# Altium PCB photon_v1.0.0.pcbdoc
Units mil, origin at the board's own origin, x right, y up, seen from the top; angles counter-clockwise.
Board outline not stored, 2 copper layers (Top, Bottom), stack 0 mil thick; 54 components, 59 nets, 229 pads, 110 vias.
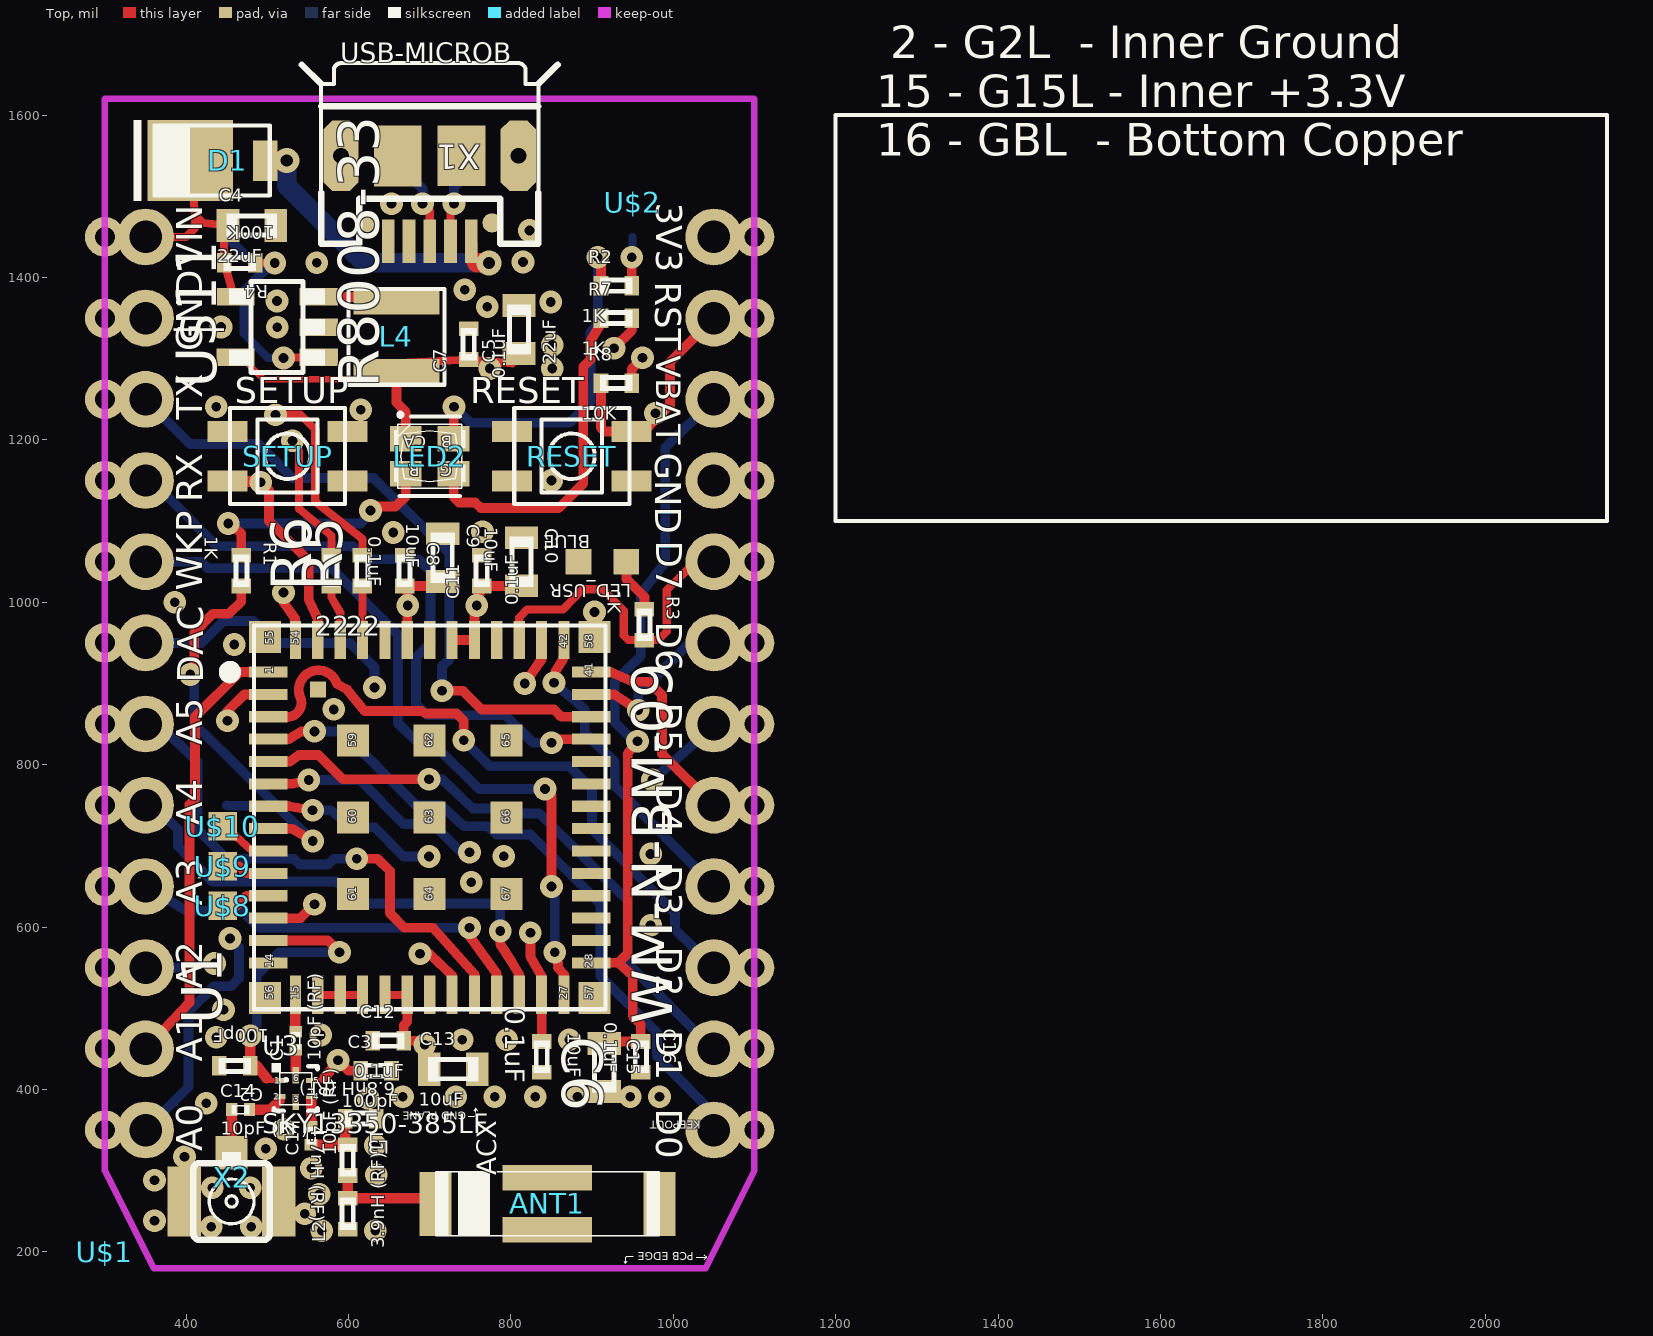
[diagram p0: Top view]
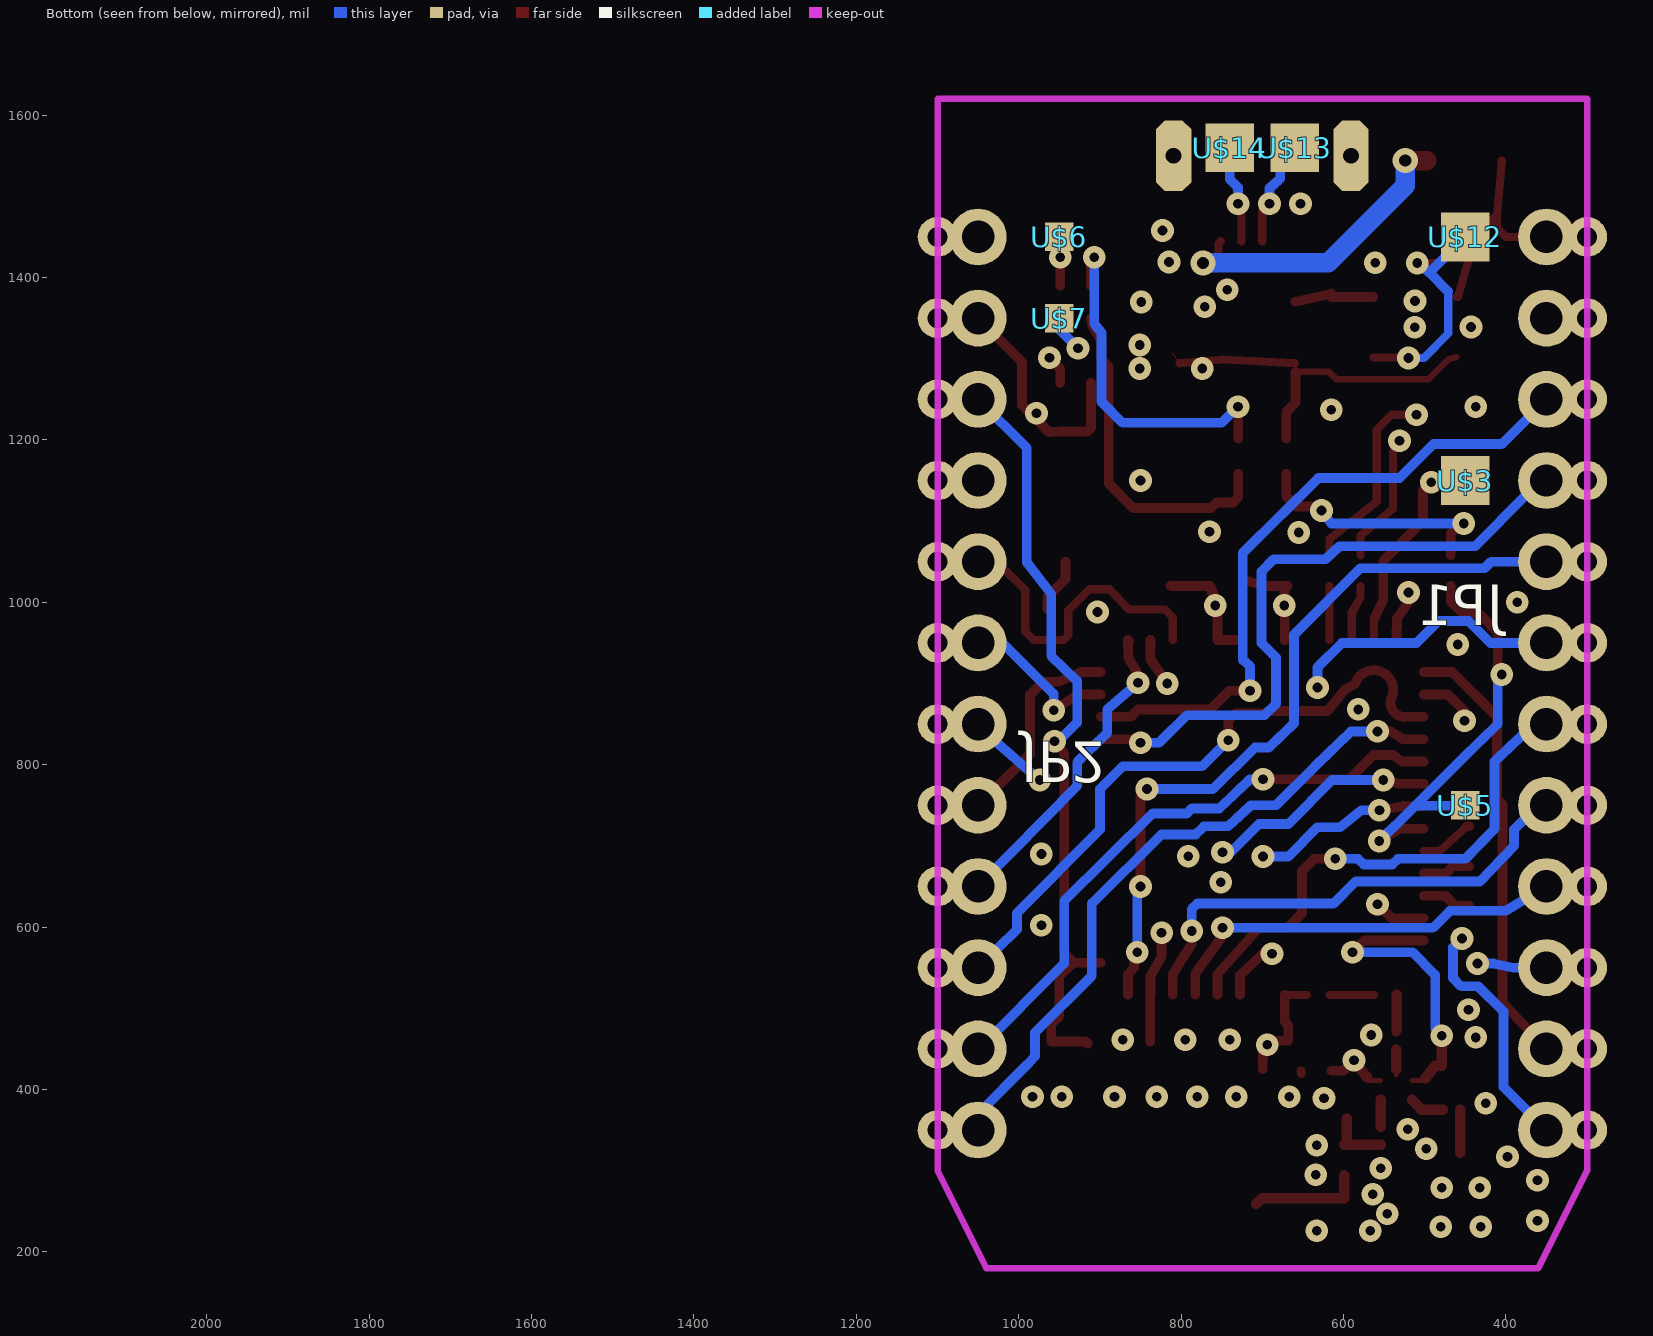
[diagram p1: Bottom view, seen from below]

## Layer stack, top to bottom

## Components (designator, comment, footprint, x,y, rotation, side; value= is the part's Value field where it differs from the comment)
ANT1 "" AT7020 845,259 r180 top
C1 "10pF (RF)" C0201_B 535,460 r90 top
C2 "100pF" C0402_B 460,429 r180 top
C3 "100pF" C0402_B 634,423 r0 top
C4 "22uF" C0603_B 481,1464 r0 top
C5 "22uF" C0603_B 810,1336 r90 top
C6 "0.1uF" C0402_B 838,440 r270 top
C7 "0.1uF" C0402_B 748,1318 r90 top
C8 "0.1uF" C0402_B 669,1039 r270 top
C9 "10uF" C0603_B 716,1055 r270 top
C10 "10uF" C0603_B 813,1050 r270 top
C11 "0.1uF" C0402_B 764,1039 r90 top
C12 "0.1uF" C0402_B 649,460 r0 top
C13 "10uF" C0603_B 729,425 r0 top
C14 "10pF (RF)" C0201_B 467,375 r0 top
C15 "10uF" C0603_B 915,427 r270 top
C16 "0.1uF" C0402_B 960,440 r270 top
C17 "10pF (RF)" C0201_B 554,343 r90 top
D1 "" DIODE-DO-220AA(SMP) 405,1544 r0 top
JP1 "" 1X12-CASTELLATED 350,900 r0 bottom
JP2 "" 1X12-CASTELLATED 1050,900 r180 bottom
L1 "4.7nH (RF)" L0402_B 599,313 r270 top
L2 "3.9nH (RF)" L0402_B 599,247 r90 top
L3 "6.8nH (RF)" L0402_B 615,364 r180 top
L4 "" INDUCTOR-NR3015 659,1327 r270 top
LED2 "" PLCC4-2MM-RGB 700,1180 r180 top
LED_USR "BLUE" LED-0603-NO-SS 913,1050 r90 top
R1 "1K" R0402_B 468,1039 r270 top
R2 "1K" R0402_B 930,1390 r0 top
R3 "1K" R0402_B 964.48,972.47 r270 top
R4 "100K" R0402_B 466,1418 r180 top
R5 "22" R0402_B 617,1039 r90 top
R6 "22" R0402_B 579,1039 r90 top
R7 "1K" R0402_B 930,1350 r0 top
R8 "10K" R0402_B 930,1270 r0 top
RESET "" TACTILE_SWITCH_SMD 875,1180 r0 top
SETUP "" TACTILE_SWITCH_SMD 525,1180 r0 top
U1 "WM-N-BM-09" WM-N-BM-09 700,735 r90 top
U3 "SKY13350-385LF" XFDFN-6 535,401 r0 top
U$1 "" PHOTON-TOP-SS-2 300,200 r0 top
U$2 "" SPARK_LOGO2 950,1493 r0 top
U$3 "" TP60_BOT 450,1150 r0 top
U$5 "" TP35_BOT 450,750 r0 top
U$6 "" TP35_BOT 950,1450 r0 top
U$7 "" TP35_BOT 950,1350 r0 top
U$8 "" TP35_BOT 445,626 r0 bottom
U$9 "" TP35_BOT 445,675 r0 bottom
U$10 "" TP35_BOT 445,724 r0 bottom
U$11 "R8008-33" SOT23-5 512,1339 r90 top
U$12 "" TP60_BOT 450,1450 r0 top
U$13 "" TP60_BOT 660,1560 r0 top
U$14 "" TP60_BOT 740,1560 r0 top
X1 "USB-MICROB" USB-MICROB-SLOT-HOLE 700,1550 r180 top
X2 "" IPEX-20279-001E 456,262 r0 top

## Footprints (in the part's own frame and the unit in brackets; to place one, negate y for a bottom-side part, rotate by r counter-clockwise, add the part's x,y. Pads: shape width x height; smd on the part's side, far side on the other; paste and mask are expansions set on the pad)
1X12-CASTELLATED [mil]
  round 70 hole 40: 1(0,550) 2(0,450) 3(0,350) 4(0,250) 5(0,150) 6(0,50) 7(0,-50) 8(0,-150) 9(0,-250) 10(0,-350) 11(0,-450) 12(0,-550)
  round 49 hole 25: @1(-50,550) @2(-50,450) @3(-50,350) @4(-50,250) @5(-50,150) @6(-50,50) @7(-50,-50) @8(-50,-150) @9(-50,-250) @10(-50,-350) @11(-50,-450) @12(-50,-550)
AT7020 [mm]
  rect 1x2 smd: 1(3.5,0) 3(-3.5,0)
  rect 2.8x0.8 smd: 2(0,0.815) 4(0,-0.815)
  silkscreen extent -4.99,-2.99 4.99,1.86
C0201_B [mil]
  rect 14x16 smd: 1(-11,0) 2(11,0)
  silkscreen extent -11,-6 11,6
C0402_B [mil]
  rect 18x24 smd: 1(-19,0) 2(19,0)
  silkscreen extent -20,-10 20,10
C0603_B [mil]
  rect 28x41 smd: 1(-29.5,0) 2(29.5,0)
  silkscreen extent -31,-15 31,15
DIODE-DO-220AA(SMP) [mil]
  rect 30x50 smd: ANODE(92.5,0)
  rect 105x100 smd: CATHODE(0,0)
  silkscreen extent -70,-50 98,50
INDUCTOR-NR3015 [mm]
  rect 0.8x2.7 smd: 1(-1.1,0) 2(1.1,0)
  silkscreen extent -1.5,-1.5 1.5,1.5
IPEX-20279-001E [mm]
  rect 1x1.05 smd: 1(0,1.528)
  rect 1.05x2.2 smd: 2@1(-1.475,0) 2@2(1.475,0)
  silkscreen extent -1.2,-1.2 1.2,1.55
L0402_B [mil]
  rect 18x24 smd: 1(-19,0) 2(19,0)
  silkscreen extent -20,-10 20,10
LED-0603-NO-SS [mm]
  rect 0.8x0.8 smd: A1(0,-0.745) C1(0,0.755)
PHOTON-TOP-SS-2 [mil]
PLCC4-2MM-RGB [mm]
  rect 1x0.8 smd: BLUE(-0.75,-0.55) CA(0.75,-0.55) GREEN(-0.75,0.55) RED(0.75,0.55)
  silkscreen extent -1.12,-1.32 1.12,1.24
R0402_B [mil]
  rect 18x24 smd: 1(-19,0) 2(19,0)
  silkscreen extent -20,-10 20,10
SOT23-5 [mm]
  rect 0.55x1.2 smd: 1(-0.95,-1.3) 2(0,-1.3) 3(0.95,-1.3) 4(0.95,1.3) 5(-0.95,1.3)
  silkscreen extent -1.42,-1.5 1.42,1.5
SPARK_LOGO2 [mil]
TACTILE_SWITCH_SMD [mm]
  rect 1.25x0.65 smd: 1(-1.875,0.775) 2(1.875,0.775) 3(-1.875,-0.775) 4(1.875,-0.775)
  silkscreen extent -1.8,-1.5 1.8,1.5
TP35_BOT [mil]
  rect 35x35 smd far side: P$1(0,0)
TP60_BOT [mil]
  rect 60x60 smd far side: P$1(0,0)
USB-MICROB-SLOT-HOLE [mm]
  rect 0.4x1.35 smd: D+(0,2.675) D-(-0.65,2.675) GND(1.3,2.675) ID(0.65,2.675) VBUS(-1.3,2.675)
  oct 1.11x2.219 hole 0.5: MT1(-2.775,0) MT2(2.775,0)
  rect 1.5x1.9 smd: P$1(-1,0) P$2(1,0.01)
  round 0.6 smd: ""(-1.95,2.1) ""(1.95,2.1)
  silkscreen extent -4,-2.9 4,2.75
WM-N-BM-09 [mm]
  rect 0.35x1.2 smd: 1(4.55,5.05) 2(3.85,5.05) 3(3.15,5.05) 4(2.45,5.05) 5(1.75,5.05) 6(1.05,5.05) 7(0.35,5.05) 8(-0.35,5.05) 9(-1.05,5.05) 10(-1.75,5.05) 11(-2.45,5.05) 12(-3.15,5.05) 13(-3.85,5.05) 14(-4.55,5.05) 28(-4.55,-5.05) 29(-3.85,-5.05) 30(-3.15,-5.05) 31(-2.45,-5.05) 32(-1.75,-5.05) 33(-1.05,-5.05) 34(-0.35,-5.05) 35(0.35,-5.05) 36(1.05,-5.05) 37(1.75,-5.05) 38(2.45,-5.05) 39(3.15,-5.05) 40(3.85,-5.05) 41(4.55,-5.05)
  rect 1.2x0.35 smd: 15(-5.55,4.2) 16(-5.55,3.5) 17(-5.55,2.8) 18(-5.55,2.1) 19(-5.55,1.4) 20(-5.55,0.7) 21(-5.55,0) 22(-5.55,-0.7) 23(-5.55,-1.4) 24(-5.55,-2.1) 25(-5.55,-2.8) 26(-5.55,-3.5) 27(-5.55,-4.2) 42(5.55,-4.2) 43(5.55,-3.5) 44(5.55,-2.8) 45(5.55,-2.1) 46(5.55,-1.4) 47(5.55,-0.7) 48(5.55,0) 49(5.55,0.7) 50(5.55,1.4) 51(5.55,2.1) 52(5.55,2.8) 53(5.55,3.5) 54(5.55,4.2)
  rect 1x1 smd: 55(5.65,5.15) 56(-5.65,5.15) 57(-5.65,-5.15) 58(5.65,-5.15) 59(2.4,2.4) 60(0,2.4) 61(-2.4,2.4) 62(2.4,0) 63(0,0) 64(-2.4,0) 65(2.4,-2.4) 66(0,-2.4) 67(-2.4,-2.4)
  rect 0.5x0.5 smd: 68(4,3.5)
  silkscreen extent -6,-5.5 6,6.4
XFDFN-6 [mm]
  rect 0.33x0.15 smd: 1(-0.485,0.25) 2(-0.485,-0.25) 4(0.485,-0.25) 5(0.485,0.25)
  rect 0.2x0.51 smd: 3(0,-0.42) 6(0,0.42)
  silkscreen extent -0.76,-0.7 0.69,0.8

## Via types
v1: diameter 28, hole 12, Top to Bottom, 60 vias
v2: diameter 27.81, hole 11.81, Top to Bottom, 48 vias
v3: diameter 31, hole 15, Top to Bottom, 2 vias

## Nets (pads, with @x,y where several pads share a name; then routed paths per layer and width w, separated by ;. In a path a pad name is that pad's centre, name@x,y a point inside that pad or via, vN(x,y) a via of type N, cw(c..) or ccw(c..) an arc to the next point about the centre after c; other vN are vias at no path point)
!RST: C6.1 JP2.2 R8.1 RESET.2 U1.26 | length 447.1
  Top w10: U1.26 U1.26@838,516.29
  Top w12: v1(824,593) 824,564 837.79,539.21 U1.26 ; C6.1 U1.26@838,516.29 ; R8.1 911,1215 915.49,1210.51 RESET.2 ; v1(978,1233) 983,1232 v1@980.51,1227.51 ; JP2.2 996,1296 996,1243 v1@980.51,1227.51 ; RESET.2 962.82,1209.82 RESET.2@963,1210 ; RESET.2 RESET.2@963,1210 ; RESET.2@963,1210 v1@980.51,1227.51
!SETUP: SETUP.3 U1.53 U$3.P$1 | length 347
  Top w10: U1.53 562.21,978.79
  Top w12: 562.21,978.79 551,1003 551,1050.69 546.31,1055.69 502,1100 502,1138 v1(492,1148) ; v1(492,1148) 490.51,1149.49 SETUP.3 452.67,1148 v1(492,1148)
  Bottom w12: U$3.P$1 490,1150 v1(492,1148)
+3V3: C5.1 C7.1 C8.2 C9.2 C10.2 C11.1 C12.2 C13.1 JP2.1 L4.2 LED2.CA R8.2 U1.19 U1.20 U1.46 U1.47 U1.49 U$11.5 | length 957.4
  Top w0.31: L4.2 L4.2@659.72,1294.41 ; C5.1@801.87,1294.41 C5.1
  Top w8: U$11.5 470.4,1299.6 495,1275 609,1275 617.69,1283.69 L4.2
  Top w10: U1.19 U1.20 ; L4.2@659.72,1294.41 C7.1 C5.1@801.87,1294.41
  Top w12: L4.2 659,1246 670.47,1234.53 LED2.CA ; C8.2 C8.2@672.44,1020 ; U1.20 672.44,483.44 668,479 C12.2 689,460 v1(694,455) 699,450 C13.1 ; U1.49 C8.2@672.44,1020 ; v1(673,996) 673,1019.44 C8.2@672.44,1020 ; C9.2 699,1020 C8.2@672.44,1020 ; U1.47 U1.46 755.12,991.88 755,998 C11.1 ; v1(758,996) C11.1 ; C10.2 812,1020 C11.1 ; R8.2 949,1287.24 v1(961.98,1301.21)
  other v1: 774,1288 851,1288 851,1317
A0: JP1.1 U1.54 | length 363.4
  Top w12: v1(520,1012) 520,1000 534,980 U1.54
  Bottom w12: JP1.1 403,403 403,496 434,527 455,527 465,537 465,575 v1(454,586)
A1: JP1.2 U1.1 | length 546.4
  Top w12: JP1.2 404,507 404,751 411,758 411,859 466.13,914.13 U1.1
A2: JP1.3 U1.2 | length 156.2
  Top w12: v1(451,854) 451,866 471.57,886.58 U1.2
  Bottom w12: JP1.3 391,550 415,555 v1(435,555)
A3: JP1.4 U1.24 | length 509.4
  Top w12: v1(749,599) 749,589 782.68,542.32 U1.24
  Bottom w12: JP1.4 400,620 469,620 490,599 v1(749,599)
A4: JP1.5 U1.25 | length 614.4
  Top w12: v1(787,595) 787,579 801,557 810,542 810,541 810.24,534.76 U1.25
  Bottom w12: JP1.5 360,750 390,720 390,700 432,656 585,656 612,629 780,629 787,622 v1(787,595)
A5: JP1.6 U1.23 | length 644.3
  Top w12: v1(610,684) 636,684 651,669 651,617 669,599 704,599 755.12,541.88 U1.23
  Bottom w12: JP1.6 365,850 395,822 414,804 414,721 450,684 533,684 540,677 575,677 582,684 v1(610,684)
ANT: C1.2 U1.15 | length 45.5
  Top w12: C1.2@534.65,474.35 C1.2
  Top w13: C1.2@534.65,474.35 U1.15
BTCX_RF_ACTIVE: U1.9 U$10.P$1 | length 67.9
  Top w10: U$10.P$1@448,724 481.34,693.66 U1.9
  Top w12: U$10.P$1 U$10.P$1@448,724
BTCX_STATUS: U1.10 U$9.P$1 | length 59.9
  Top w12: U$9.P$1 465,675 473.9,666.1 U1.10
BTCX_TXCONF: U1.11 U$8.P$1 | length 61.4
  Top w12: U$8.P$1 462,626 474.54,638.54 U1.11
CHIP_ANT: C17.1 L1.1 L3.2 | length 79.5
  Top w13: C17.1 L1.1 cw(c598,334) 596,333 L3.2
D0: JP2.12 U1.4 | length 834.9
  Top w12: U1.4 525.54,831.46 526.54,831.54 542,841 v1(558,841)
  Bottom w12: v1(558,841) 591,841 635,798 683,750 714,750 742,724 772,724 782,714 824,714 910,629 910,540 980,470 980,441 989,431 1050,370 JP2.12
D1: JP2.11 U1.5 | length 745.7
  Top w12: U1.5 501.28,804 528,804 539,812 563,812 593,782 v1(699,782)
  Bottom w12: v1(699,782) 715,782 753,746 787,746 793,740 835,740 944,632 944,555 1049,450 JP2.11
D2: JP2.10 U1.3 | length 799.9
  Top w12: U1.3 522,859 ccw(c524.6,876.2) 541,882 cw(c562.86,892.19) 586,899 598,893 620,866 690,866 695,863 733,863 742,854 v1(742,830)
  Bottom w12: v1(742,830) 774,798 872,798 900,770 900,720 1002,617 1002,597 JP2.10
D3: JP2.9 U1.42 | length 391.3
  Top w12: v1(853,901) 855,915 864,929 865,932.15 U1.42 U1.42@864,952.15
  Bottom w12: v1(853,901) 891,868 891,839 928,803 928,774 JP2.9
D4: JP2.8 U1.41 | length 259.1
  Top w12: U1.41 922.87,914.13 951,902 970,902 986,886 986,813 1007,792 JP2.8
D5: JP2.7 U1.43 | length 163
  Top w12: v1(817,900) 820,904 838,930 838,930.3 U1.43
  Bottom w12: v1(974,781) 1028.68,828.68 1037.68,836.94 1045,843 JP2.7
D6: JP2.6 U1.40 | length 203.2
  Top w12: U1.40 927.42,886.58 v1(957,867)
  Bottom w12: v1(957,867) 957,887 1020,950 JP2.6
D7: JP2.5 R3.2 U1.44 | length 414.4
  Top w10: U1.44 810.24,981.24 820,991 864,991 888,1016 913,1016 939,990 939,959 944.53,953.47 R3.2 981.47,953.47 992,964 992,1015 1023,1046 1023,1063 JP2.5
DAC: JP1.7 U1.22 | length 416
  Top w12: v1(688,567) 700,567 727.56,540.44 U1.22
  Bottom w12: JP1.7 419,950 446,977 483,977 510,950 602,950 632,920 v1(632,895)
GND: C2.2 C3.2 C4.2 C5.2 C6.2 C7.2 C8.1 C9.1 C10.1 C11.2 C12.1 C13.2 C15.2 C16.2 JP1.11 JP2.4 L2.1 L3.1 LED_USR.C1 RESET.3 RESET.4 SETUP.1 SETUP.2 U1.14 U1.16 U1.17 U1.18 U1.21 U1.29 U1.30 U1.37 U1.45 U1.48 U1.50 U1.55 U1.56 U1.57 U1.58 U1.59 U1.60 U1.61 U1.62 U1.63 U1.64 U1.65 U1.66 U1.67 U3.3 U$11.2 X1.GND X1.MT1 X1.MT2 X2.2@1 X2.2@2 | length 63.2
  Top w10: U1.16 U1.17 U1.18 ; C3.2@652,423 652,419 C3.2
  other v1: 443,1339 849,1370 512,1371 815,1419 823,1458 653,1491
  other v2: 567,226 633,226 431,231 480,231 361,238 546,247 564,271 432,279 479,279 361,288 634,295 554,303 398,317 498,327 633,331 521,351 425,383 624,389 667,391 732,391 780,391 830,391 882,391 947,391 983,391 740,461 795,461 872,461 437,464 566,467 446,498 972,602 751,655 791,687 972,690 582,868 459,948 903,988 386,1000 655,1086 765,1087 850,1150 615,1237 437,1241 512,1339 771,1364 743,1385 561,1418
LED1: LED_USR.A1 R3.1 | length 67.6
  Top w12: LED_USR.A1 942.53,1028.47 964.48,1006.52 R3.1
MCU_USB_DM: R6.1 U1.52 | length 69.4
  Top w10: R6.1 579,1006 589.76,987.24 U1.52
MCU_USB_DP: R5.1 U1.51 | length 66.5
  Top w10: R5.1 617,986.83 U1.51
N$1: R5.2 U$13.P$1 X1.D+ | length 371.1
  Top w10: v1(510,1231) 541,1231 559,1213 559,1124 617,1078 R5.2 ; v1(691,1491) 700,1482 X1.D+
  Bottom w12: U$13.P$1 678,1540 678,1522 680,1520 691,1510 v1(691,1491)
N$2: ANT1.1 L1.2 L2.2 | length 139.1
  Top w13: L1.2 L2.2 700.21,266 ANT1.1
N$3: L4.1 U$11.3 | length 101.6
  Top w12: U$11.3 563.18,1376 615,1376 615,1380.31 L4.1
N$4: 
N$5: 
N$6: R6.2 U$14.P$1 X1.D- | length 284
  Top w10: v1(531,1199) 539,1186 539,1115 579,1082 R6.2 ; X1.D-@726,1445.09 X1.D- 725.59,1486.59 v1(730,1491)
  Bottom w12: v1(730,1491) 730,1511 740,1521 U$14.P$1
N$7: R4.1 U$11.1 U$12.P$1 | length 294.6
  Top w10: R4.1 v1(509,1418) ; v1(520,1301) 528.18,1301.19 U$11.1
  Bottom w10: 471,1383 471,1331 501,1301 v1(520,1301)
  Bottom w12: U$12.P$1 494,1406 ; 471,1383 494,1406 ; v1(509,1418) 494,1406
N$8: 
N$9: C1.1 U3.6 | length 31.5
  Top w6: U3.6 U3.6@535,425
  Top w13: U3.6@535,425 C1.1
N$10: C14.2 U3.2 | length 46.9
  Top w6: 515.91,387.67 U3.2
  Top w12: 515.23,386.99 515.91,387.67
  Top w13: C14.2 504,375 515.23,386.99
N$11: C17.2 U3.4 | length 37.2
  Top w6: 554,387 U3.4
  Top w13: C17.2 554,387
N$17: 
N$18: 
N$19: 
N$20: 
N$21: 
N$22: 
N$27: LED2.BLUE R2.1 | length 443.7
  Top w12: LED2.BLUE 729.53,1226.53 v1(730,1241) ; v1(907,1425) 911,1418 R2.1
  Bottom w12: v1(730,1241) 750,1221 872,1221 898,1247 898,1332 907,1343 v1(907,1425)
N$29: LED2.GREEN R7.1 | length 417.2
  Top w12: LED2.GREEN 729.53,1129.47 736,1123 756,1123 763,1116 859,1116 889,1146 889,1290 898,1299 898,1321 909,1340 R7.1
N$54: LED2.RED R1.1 | length 308.6
  Top w12: v1(452,1097) 468,1085 R1.1 ; v1(627,1113) 632,1118 658,1118 670.47,1130.47 LED2.RED
  Bottom w12: v1(452,1097) 615,1097 v1(627,1113)
RF_SW_CTRL0_ANT0: C2.1 U1.13 U3.1 | length 367.7
  Top w6: 499,414 504,411 U3.1
  Top w12: U1.13 574.58,583.42 v1(589,569)
  Top w13: v1(479,466) C2.1 487,429 499,414
  Bottom w12: v1(479,466) 487,474 487,541 515,569 v1(589,569)
RF_SW_CTRL3_ANT1: C3.1 U1.12 U3.5 | length 151.7
  Top w6: U3.5 569,411 571,415
  Top w10: v1@586,427.4 v1(587,436)
  Top w12: U1.12 540.98,610.98 v1(558,628) ; v1(587,436) 600,423 C3.1
  Top w13: 571,415 586,434 v1(587,436)
RGB_BLUE: R2.2 U1.6 U$6.P$1 | length 345.6
  Top w12: U1.6 531.34,776.34 547,780 v1(551,781) ; R2.2 v1(949,1425)
  Bottom w10: v1(949,1425) 950,1426 U$6.P$1
  Bottom w12: v1(551,781) 614,781 668,727 704,727 739,692 v1(749,692)
RGB_GREEN: R7.2 U1.7 U$7.P$1 | length 314.2
  Top w12: U1.7 526,749 v1(555.78,743.78) ; v1(927,1313) 949,1335 R7.2 R7.2@950,1350
  Bottom w12: v1(555.78,743.78) 578.22,743.78 604,723 632,723 668,687 v1(699,687) ; v1(927,1313) 950,1336 U$7.P$1
RGB_RED: R1.2 U1.8 U$5.P$1 | length 535.7
  Top w12: v1(405,911) 410,916 410,963 433,986 453,986 468,1001 R1.2 ; U1.8 530.78,721.22 v1(556,706)
  Bottom w12: v1(405,911) 410,906 410,850 454,807 511.5,749.5 ; U$5.P$1 450.5,749.5 511.5,749.5 ; v1(556,706) 547,715 532,729 511.5,749.5
RX: JP1.9 U1.38 | length 803.5
  Top w12: v1(850,827) 854.46,831.46 U1.38
  Bottom w12: JP1.9 375,1132 438,1069 605,1069 622,1053 686,1053 701,1038 701,950 683,932 683,875 697,861 793,861 827,827 v1(850,827)
TX: JP1.10 U1.39 | length 823.1
  Top w12: v1(715,891) 741,891 764,868 853,868 857,864 862.02,859.02 U1.39
  Bottom w12: JP1.10 405,1195 489,1195 531,1153 631,1153 724,1061 724,929 715,921 v1(715,891)
UFL_ANT: C14.1 X2.1 | length 52.9
  Top w13: X2.1 C14.1
UVCC: D1.ANODE X1.VBUS | length 390.4
  Top w10: X1.VBUS 754,1441.87 X1.VBUS@754,1422
  Top w20: X1.VBUS@754,1422 v3@758,1418
  Top w24: D1.ANODE v3(524,1544) ; v3@758,1418 v3(773,1418)
  Bottom w24: v3(524,1544) 524,1513 619,1418 v3(773,1418)
VBAT: C15.1 C16.1 JP2.3 U1.28 | length 987.8
  Top w10: U1.28 899.68,556 932,556
  Top w12: U1.28 932.13,555.87 ; C15.1 918,459 C16.1 960,480 959,481 950,490 950,540 932.13,555.87 ; v1(956,829) 944,814 944,567.73 932.13,555.87
  Bottom w12: v1(956,829) 951,829 928,852 928,903 960,934 960,1010 990,1049 990,1190 JP2.3
VIN: C4.1 D1.CATHODE JP1.12 R4.2 U$11.4 | length 285.7
  Top w10: JP1.12 400,1450 411,1461 411,1477 ; D1.CATHODE 411,1477 ; U$11.4 459,1376.22 R4.2 446.54,1448.54 C4.1 421,1467 411,1477
WKP: JP1.8 U1.27 | length 933.1
  Top w12: v1(842,770) 850,762 v1(850,650) ; v1(854,569) 858,556 858,550 865.35,541.65 U1.27
  Bottom w12: JP1.8 418,1050 426,1042 579,1042 661,960 661,851 692,821 709,821 761,770 v1(842,770) ; v1(850,650) 854,646 v1(854,569)
pads on no net: ANT1.2 ANT1.3 ANT1.4 JP1.@1 JP1.@2 JP1.@3 JP1.@4 JP1.@5 JP1.@6 JP1.@7 JP1.@8 JP1.@9 JP1.@10 JP1.@11 JP1.@12 JP2.@1 JP2.@2 JP2.@3 JP2.@4 JP2.@5 JP2.@6 JP2.@7 JP2.@8 JP2.@9 JP2.@10 JP2.@11 JP2.@12 RESET.1 SETUP.4 U1.31 U1.32 U1.33 U1.34 U1.35 U1.36 U1.68 X1. X1.ID X1.P$1 X1.P$2

## Keep-outs
Keep-Out:
  lines w8: 300,300 300,1620 1100,1620 1100,300 1040,180 360,180 300,300

## Silkscreen, mask and mechanical layers (free items; w line width, h text height)
Layer0:
  rectangle: 608,1312 712,1342
  lines w10 net N$1: 510,1231 562,1283 562,1368 603,1409 684,1409 702,1427 702,1480 691,1491
  lines w10 net N$6: 531,1199 539,1210 539,1230 582,1273 582,1357 613,1389 697,1389 723,1415 723,1483 730,1491
  lines w12 net !RST: 824,593 824,630 820,634 820,667 825,672 825,701 813,713 813,775 819,790 819,857 789,887 789,915 860,986 860,998 904,1042 960,1100 960,1215 978,1233
  lines w12 net A0: 454,586 454,778 416,816 416,864 438,886 438,925 430,933 430,965 471,1005 478,1012 520,1012
  lines w12 net A2: 435,555 468,555 486,573 486,784 451,819 451,854
  lines w12 net D5: 817,900 842,869 879,869 900,848 900,820 939,781 974,781
  lines w12 net DAC: 632,895 655,872 655,635 688,602 688,567
  lines w12 net RF_SW_CTRL3_ANT1: 558,628 574,628 619,583 619,551 600,532 600,449 587,436
  lines w12 net RGB_BLUE: 749,692 789,730 789,784 795,800 795,849 767,877 767,929 835,997 835,1009 934,1108 934,1232 990,1288 990,1400 965,1425 949,1425
  lines w12 net RGB_GREEN: 699,687 764,754 764,788 771,805 771,842 745,868 745,942 811,1008 811,1021 908,1118 908,1246 927,1265 927,1313
Top Overlay:
  lines w5: 1200,1100 1200,1600 2150,1600 2150,1100 1200,1100
  text "NOTES: /  / Layer stack up: /  1 - GTL  - Top Copper /  2 - G2L  - Inner Ground / 15 - G15L - Inner +3.3V / 16 - GBL  - Bottom Copper" at 1250,1550 h40

## Text inside footprints (layer, text, board x,y; h text height)
ANT1: Top Overlay "PCB EDGE" at 1025.31,199.16 h10 r180; Top Overlay "GND PLANE" at 745,372.39 h10 r180; Top Overlay "ACX" at 782.01,294.43 h24 r90; Top Overlay "KEEPOUT" at 1033.98,361.36 h10 r180
LED2: Top Overlay "CA" at 696,1205 h15 r180; Top Overlay "R" at 688,1170 h15 r180; Top Overlay "B" at 728,1205 h15 r180; Top Overlay "G" at 728,1170 h15 r180
U1: Top Overlay "1" at 507.09,912.16 h10 r90; Top Overlay "14" at 507.09,549.96 h10 r90; Top Overlay "15" at 538.58,510.59 h10 r90; Top Overlay "27" at 869.29,510.59 h10 r90; Top Overlay "28" at 900.79,549.96 h10 r90; Top Overlay "41" at 900.79,908.23 h10 r90; Top Overlay "42" at 869.29,943.66 h10 r90; Top Overlay "54" at 538.58,947.6 h10 r90; Top Overlay "55" at 507.09,947.6 h10 r90; Top Overlay "56" at 507.09,510.59 h10 r90; Top Overlay "57" at 900.79,510.59 h10 r90; Top Overlay "58" at 900.79,943.66 h10 r90; Top Overlay "59" at 609.45,821.61 h10 r90; Top Overlay "60" at 609.45,727.13 h10 r90; Top Overlay "61" at 609.45,632.64 h10 r90; Top Overlay "62" at 703.94,821.61 h10 r90; Top Overlay "63" at 703.94,727.13 h10 r90; Top Overlay "64" at 703.94,632.64 h10 r90; Top Overlay "65" at 798.42,821.61 h10 r90; Top Overlay "66" at 798.42,727.13 h10 r90; Top Overlay "67" at 798.42,632.64 h10 r90
U3: Top Overlay "1" at 508.43,406.91 h7.87; Top Overlay "2" at 507.44,387.22 h7.87; Top Overlay "3" at 532.05,384.27 h7.87; Top Overlay "4" at 556.65,387.22 h7.87; Top Overlay "5" at 556.65,406.91 h7.87; Top Overlay "6" at 532.05,409.86 h7.87
U$1: Top Overlay "A0" at 420,324 h32 r90; Top Overlay "A1" at 420,434 h32 r90; Top Overlay "A2" at 420,524 h32 r90; Top Overlay "RX" at 420,1123 h32 r90; Top Overlay "A4" at 420,724 h32 r90; Top Overlay "A3" at 420,626 h32 r90; Top Overlay "A5" at 420,824 h32 r90; Top Overlay "DAC" at 421,901 h32 r90; Top Overlay "WKP" at 420,1014 h32 r90; Top Overlay "SETUP" at 460,1245 h32; Top Overlay "RESET" at 750,1245 h32; Top Overlay "D0" at 979,376 h32 r270; Top Overlay "D1" at 979,473 h32 r270; Top Overlay "D2" at 979,576 h32 r270; Top Overlay "D3" at 979,676 h32 r270; Top Overlay "D4" at 979,777 h32 r270; Top Overlay "D5" at 979,876 h32 r270; Top Overlay "D6" at 979,976 h32 r270; Top Overlay "D7" at 979,1076 h32 r270; Top Overlay "GND" at 978,1184 h32 r270; Top Overlay "VBAT" at 979,1304 h30 r270; Top Overlay "RST" at 978,1395 h32 r270; Top Overlay "3V3" at 979,1492 h32 r270; Top Overlay "TX" at 420,1225 h32 r90; Top Overlay "GND" at 420,1309 h32 r90; Top Overlay "VIN" at 420,1413 h32 r90